# Altium PCB HUB.PcbDoc
Units mil, origin at the board's own origin, x right, y up, seen from the top; angles counter-clockwise.
Board outline 4390 x 2410 mil, 2 copper layers (Top Layer, Bottom Layer); 33 components, 16 nets, 167 pads, 15 vias.
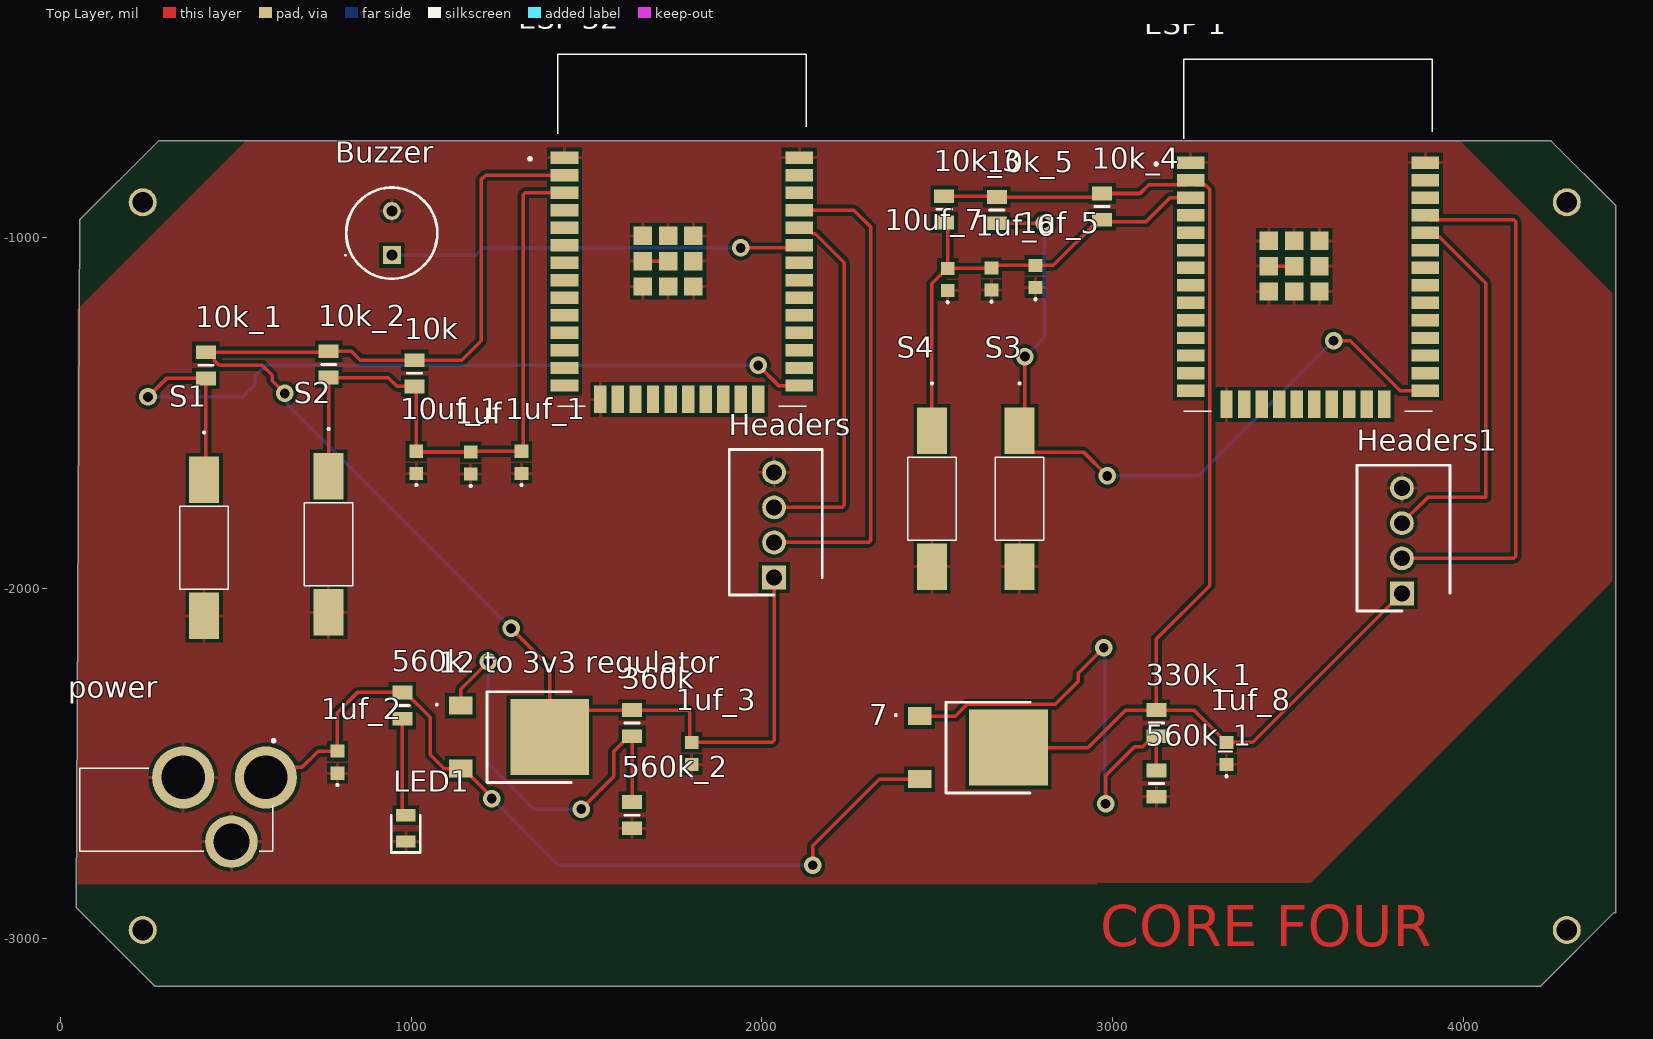
[diagram p0: Top Layer view]
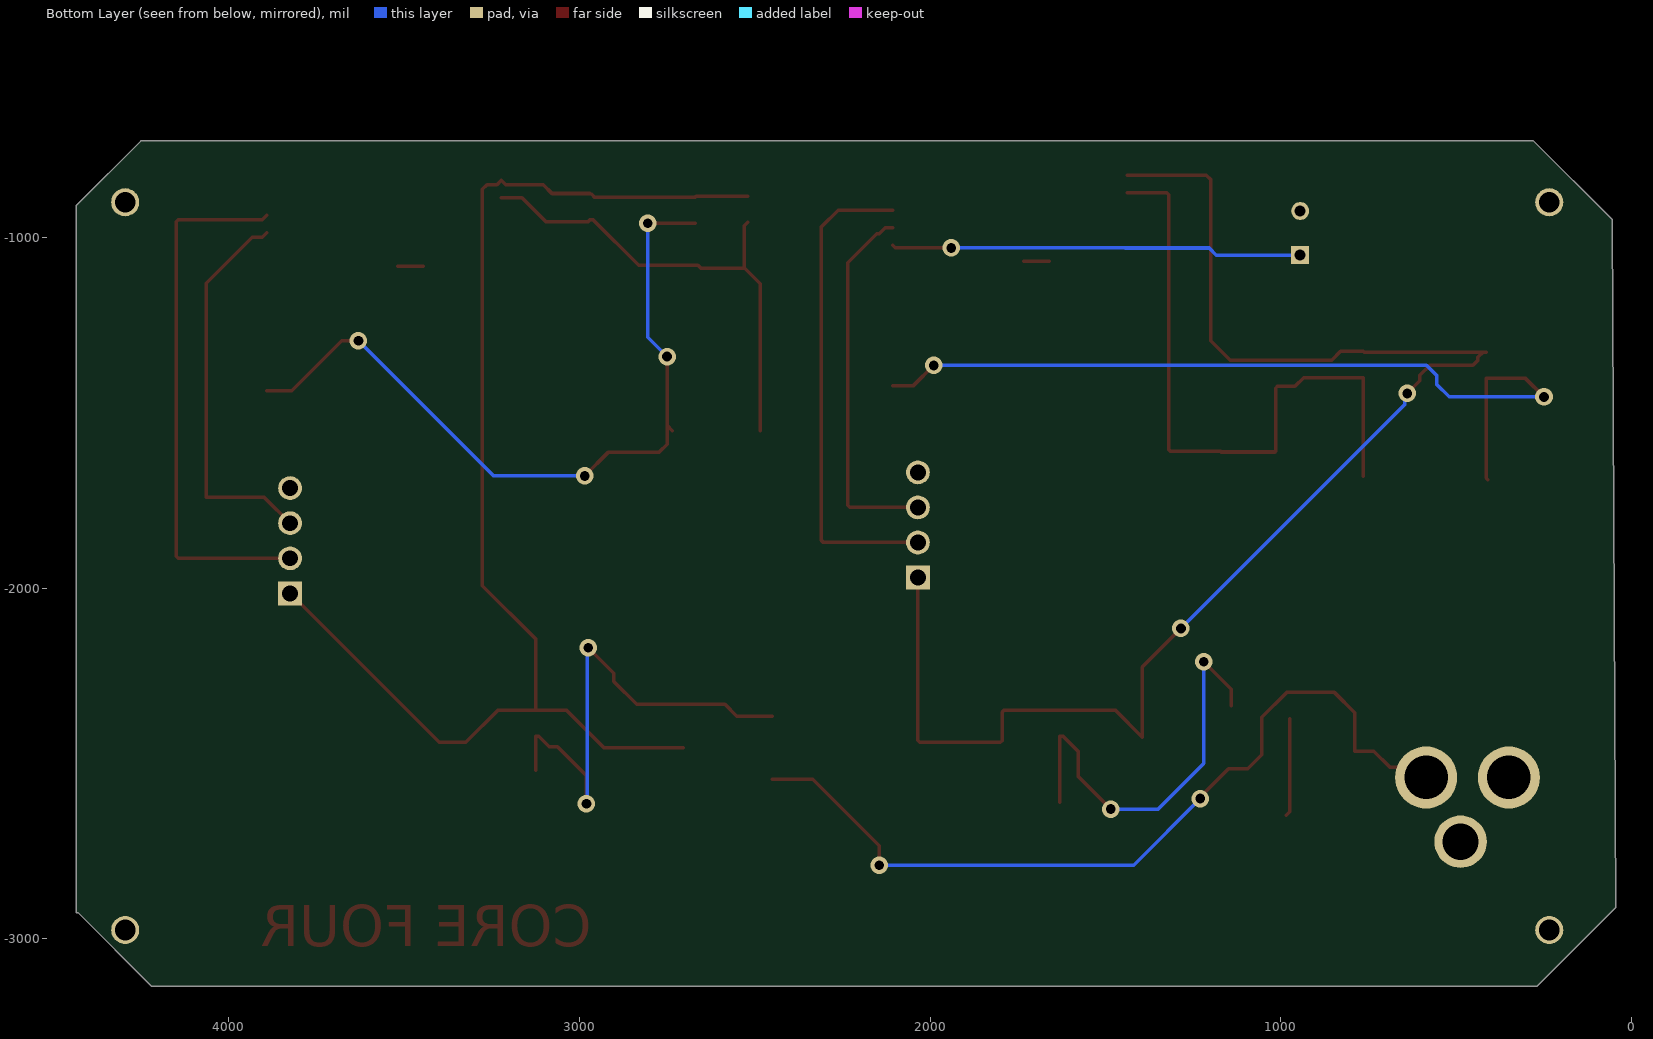
[diagram p1: Bottom Layer view, seen from below]
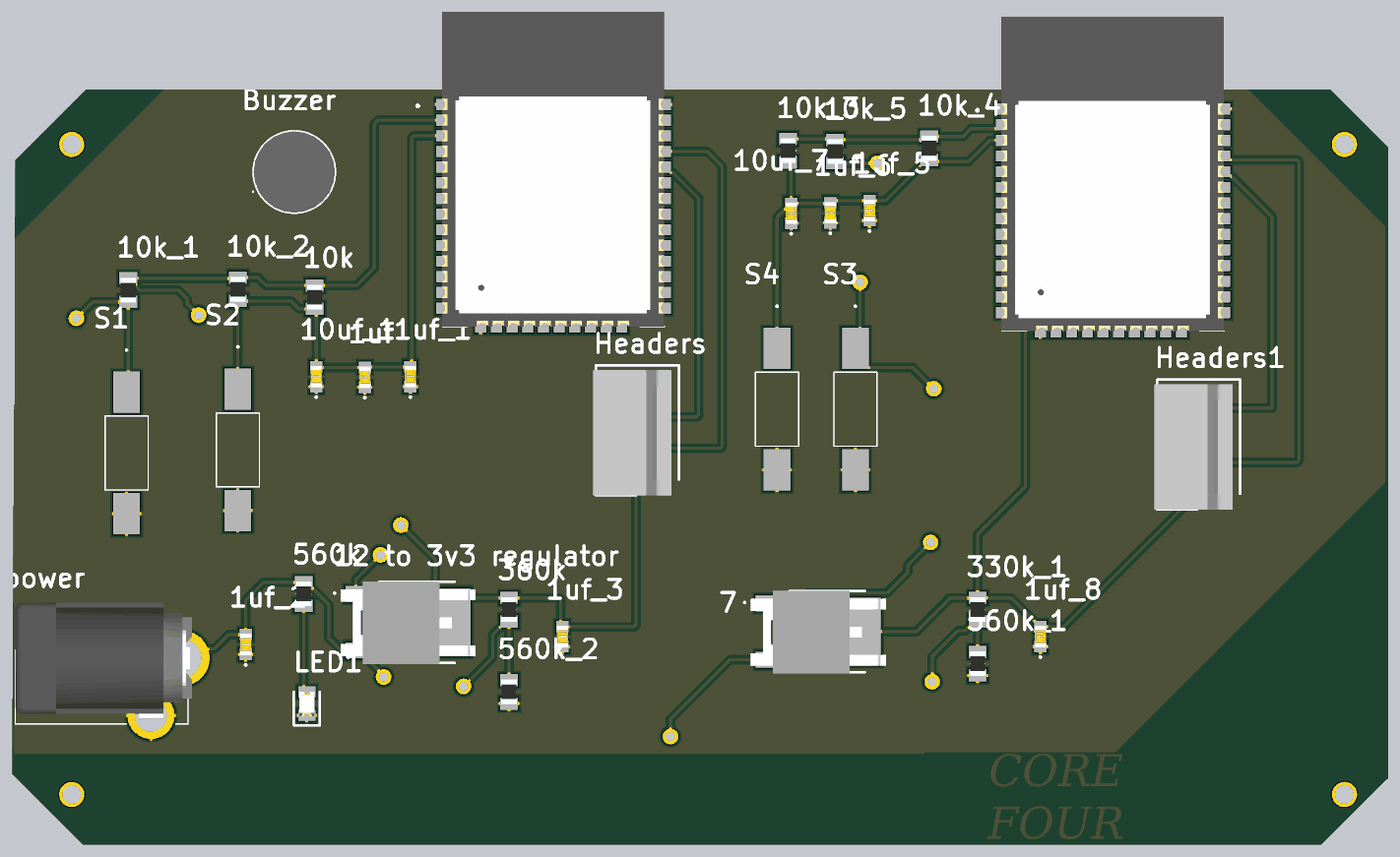
[diagram p2: 3D render of the assembled board from above, using the file's embedded part models]

## Layer stack, top to bottom
Top Solder: solder mask 0.4, Solder Resist, Dk 3.5
Top Layer: signal copper 1.4
Dielectric 1: dielectric 12.6, FR-4, Dk 4.8
Bottom Layer: signal copper 1.4
Bottom Solder: solder mask 0.4, Solder Resist, Dk 3.5

## Board outline
55,-950 280,-725 4250,-725 4435,-910 4435,-2925 4430,-2925 4220,-3135 270,-3135 45,-2910

## Design rules (kind name [scope] priority, off if disabled: settings)
Clearance [All] p1: gap=10 ignorepadtopadclearanceinfootprint=FALSE except(0: Arc-Hole Track-Hole SMDPad-Hole THPad-Hole Via-Hole Fill-Hole Poly-Hole Region-Hole Text-Hole)
PolygonConnect [All] p1: connectstyle=Relief reliefconductorwidth=10 reliefentries=4 polygonreliefangle="90 Angle" airgapwidth=10
RoutingVias [All] p1: holewidth=28 width=50 viastyle="Through Hole" minholewidth=28 minwidth=50 maxholewidth=28 maxwidth=50
SolderMaskExpansion [All] p1: expansion=4 istentingtop=FALSE
Width [All] p1: maxlimit=10 minlimit=10 preferedwidth=10
30 further rules are at their usual default settings.

## Components (designator, comment, footprint, x,y, rotation, side; value= is the part's Value field where it differs from the comment)
1uf "C0603C104K4RALTU" C0603 1170,-1643.5 r90 top
1uf_1 "C0603C104K4RALTU" C0603 1315,-1641.5 r90 top
1uf_2 "C0603C104K4RALTU" C0603 790,-2496.5 r90 top
1uf_3 "C0603C104K4RALTU" C0603 1800,-2471.5 r90 top
1uf_5 "C0603C104K4RALTU" C0603 2780,-1111.5 r90 top
1uf_6 "C0603C104K4RALTU" C0603 2655,-1118.5 r90 top
1uf_8 "C0603C104K4RALTU" C0603 3325,-2471.5 r90 top
7 "LM317AMDTX_NOPB" LM78M05CDT 2764.96,-2454.96 r270 top
10k "CPF0805B100RE1" RESC2012X65N 1010,-1387.6 r90 top
10k_1 "CPF0805B100RE1" RESC2012X65N 415,-1365 r90 top
10k_2 "CPF0805B100RE1" RESC2012X65N 765,-1362.4 r90 top
10k_3 "CPF0805B100RE1" RESC2012X65N 2520,-920 r90 top
10k_4 "CPF0805B100RE1" RESC2012X65N 2970,-912.4 r90 top
10k_5 "CPF0805B100RE1" RESC2012X65N 2670,-922.4 r90 top
10uf_1 "C0603C104K4RALTU" C0603 1015,-1641.5 r90 top
10uf_7 "C0603C104K4RALTU" C0603 2530,-1120 r90 top
"12 to 3v3 regulator" "LM317AMDTX_NOPB" LM78M05CDT 1456.42,-2425 r270 top
330k_1 "CPF0805B100RE1" RESC2012X65N 3125,-2385 r90 top
360k "CPF0805B100RE1" RESC2012X65N 1630,-2385 r90 top
560k "CPF0805B100RE1" RESC2012X65N 975,-2335 r90 top
560k_1 "CPF0805B100RE1" RESC2012X65N 3125,-2557.4 r90 top
560k_2 "CPF0805B100RE1" RESC2012X65N 1630,-2647.4 r90 top
Buzzer "CMT-6635C-030" CMT6635C030 945,-1050.98 r180 top
"ESP 1" "ESP32-WROOM-32D_M113DH3200PS3Q0_" ESP32WROOM32DM113DH3200PS3Q0 3222.48,-786.97 r0 top
"ESP 32" "ESP32-WROOM-32D_M113DH3200PS3Q0_" ESP32WROOM32DM113DH3200PS3Q0 1437.48,-772.48 r0 top
Headers "3-647050-4" SHDR4W66P0X254_1X4_1016X635X1079P 2035,-1970 r90 top
Headers1 "3-647050-4" SHDR4W66P0X254_1X4_1016X635X1079P 3825,-2015 r90 top
LED1 "150080BS75000" LEDC2012X80N 985,-2685 r90 top
power "DC-005-20A" DC00520A 586.22,-2540 r0 top
S1 "TL3302AF180QG" TL3302AF180QG 410,-1885 r270 top
S2 "TL3302AF180QG" TL3302AF180QG 765,-1875 r270 top
S3 "TL3302AF180QG" TL3302AF180QG 2735,-1745 r270 top
S4 "TL3302AF180QG" TL3302AF180QG 2485,-1745 r270 top

## Footprints (in the part's own frame and the unit in brackets; to place one, negate y for a bottom-side part, rotate by r counter-clockwise, add the part's x,y. Pads: shape width x height; smd on the part's side, far side on the other; paste and mask are expansions set on the pad)
C0603 [mm]
  rect 0.95x1 smd: 1(-0.8,0) 2(0.8,0)
  silkscreen extent -1.7,-0.05 -1.6,0.05, body extent -0.87,-0.48 0.88,0.47, height 0.87
CMT6635C030 [mm]
  rect 1.3x1.3 hole 0.8: 1(0,0)
  round 1.3 hole 0.8: 2(0,-3.2)
  silkscreen extent -3.3,-4.9 3.4,1.7, body extent -3.3,-4.89 3.3,1.69, height 4.1
DC00520A [mm]
  round 4.5 hole 3.15: 1(0,0) 2(-6,0)
  round 3.8 hole 2.625: 3(-2.5,-4.65)
  silkscreen extent -13.5,-5.33 0.6,2.72, body extent -13.49,-4.89 0.81,4.51, height 11.15
ESP32WROOM32DM113DH3200PS3Q0 [mm]
  rect 2x0.9 smd: 1(0,0) 2(0,-1.27) 3(0,-2.54) 4(0,-3.81) 5(0,-5.08) 6(0,-6.35) 7(0,-7.62) 8(0,-8.89) 9(0,-10.16) 10(0,-11.43) 11(0,-12.7) 12(0,-13.97) 13(0,-15.24) 14(0,-16.51) 25(17,-16.51) 26(17,-15.24) 27(17,-13.97) 28(17,-12.7) 29(17,-11.43) 30(17,-10.16) 31(17,-8.89) 32(17,-7.62) 33(17,-6.35) 34(17,-5.08) 35(17,-3.81) 36(17,-2.54) 37(17,-1.27) 38(17,0)
  rect 0.9x2 smd: 15(2.6,-17.51) 16(3.87,-17.51) 17(5.14,-17.51) 18(6.41,-17.51) 19(7.68,-17.51) 20(8.95,-17.51) 21(10.22,-17.51) 22(11.49,-17.51) 23(12.76,-17.51) 24(14.03,-17.51)
  rect 1.33x1.33 smd: 39(5.665,-5.665) 40(7.5,-5.665) 41(9.335,-5.665) 42(5.665,-7.5) 43(7.5,-7.5) 44(9.335,-7.5) 45(5.665,-9.335) 46(7.5,-9.335) 47(9.335,-9.335)
  silkscreen extent -2.6,-18.01 17.5,7.49, body extent -0.55,-18 17.45,7.5, height 3.1
LEDC2012X80N [mm]
  rect 0.9x1.4 smd: 1(-0.95,0) 2(0.95,0)
  silkscreen extent -1.75,-1.05 0.95,1.05, body extent -1.03,-0.63 0.97,0.63, height 0.7
LM78M05CDT [mm]
  rect 1.3x1.7 smd: 1(-2.285,-8) 2(2.285,-8)
  rect 5.5x5.7 smd: 3(0,-1.56)
  silkscreen extent -3.29,-9.77 3.29,0, body extent -3.31,-9.25 3.41,1.71, height 2.46
RESC2012X65N [mm]
  rect 1x1.45 smd: 1(-0.95,0) 2(0.95,0)
  silkscreen extent 0,-0.53 0,0.53, body extent -1,-0.63 1,0.63, height 0.65
SHDR4W66P0X254_1X4_1016X635X1079P [mm]
  rect 1.725x1.725 hole 1.15: 1(0,0)
  round 1.725 hole 1.15: 2(2.54,0) 3(5.08,0) 4(7.62,0)
  silkscreen extent -1.27,-3.48 9.27,3.25, body extent -1.28,-2.88 8.88,3.47, height 10.52
TL3302AF180QG [mm]
  rect 3.35x2.16 smd: 1(-4.925,0) 2(4.925,0)
  silkscreen extent -8.4,-1.75 3,1.75

## Part data
1uf 1uf_1 1uf_2 1uf_3 1uf_5 1uf_6 1uf_8 10uf_1 10uf_7: "Capacitor", Manufacturer_Name=KEMET, Mouser Part Number=80-C0603C104K4RAL, Arrow Part Number=C0603C104K4RALTU, Arrow Price/Stock=https://www.arrow.com/en/products/c0603c104k4raltu/kemet-corporation, Datasheet Link=https://content.kemet.com/datasheets/KEM_C1018_X7R_SnPb_SMD.pdf, Height=0.87mm, Manufacturer_Part_Number=C0603C104K4RALTU, Mouser Price/Stock=https://www.mouser.co.uk/ProductDetail/KEMET/C0603C104K4RALTU?qs=Av9gTi0A7zOg0Qy3fuNTKg%3D%3D
7 "12 to 3v3 regulator": "Integrated Circuit", Arrow Part Number=LM317AMDTX/NOPB, Manufacturer_Name="Texas Instruments", Mouser Part Number=926-LM317AMDTX/NOPB, Arrow Price/Stock=https://www.arrow.com/en/products/lm317amdtxnopb/texas-instruments, Datasheet Link=http://www.ti.com/lit/gpn/lm317a, Manufacturer_Part_Number=LM317AMDTX/NOPB, Mouser Price/Stock=https://www.mouser.co.uk/ProductDetail/Texas-Instruments/LM317AMDTX-NOPB?qs=X1J7HmVL2ZE2tJdeke3r6w%3D%3D
10k 10k_1 10k_2 10k_3 10k_4 10k_5 330k_1 360k 560k 560k_1 560k_2: "Resistor", Manufacturer_Name="TE Connectivity", Mouser Part Number=279-CPF0805B100RE1, Arrow Part Number=CPF0805B100RE1, Arrow Price/Stock=https://www.arrow.com/en/products/cpf0805b100re1/te-connectivity?region=nac, Datasheet Link=http://docs-europe.electrocomponents.com/webdocs/13d1/0900766b813d116f.pdf, Height=0.65mm, Manufacturer_Part_Number=CPF0805B100RE1, Mouser Price/Stock=https://www.mouser.co.uk/ProductDetail/TE-Connectivity-Holsworthy/CPF0805B100RE1?qs=9ylKvqdyudkCWLPT1QvLZQ%3D%3D
Buzzer: "Undefined or Miscellaneous", Manufacturer_Name="CUI Devices", Mouser Part Number=490-CMT-6635C-030, Datasheet Link=https://www.cuidevices.com/product/resource/cmt-6635c-030.pdf, Height=4mm, Manufacturer_Part_Number=CMT-6635C-030, Mouser Price/Stock=https://www.mouser.co.uk/ProductDetail/CUI-Devices/CMT-6635C-030?qs=qCxwlXJ4fnxPFuZxoalErQ%3D%3D
"ESP 1" "ESP 32": "Integrated Circuit", Manufacturer_Name="Espressif Systems", Manufacturer_Part_Number=ESP32-WROOM-32D(M113DH3200PS3Q0), Mouser Part Number=356-ESPWROOM3200PS3, Datasheet Link=https://componentsearchengine.com/Datasheets/1/ESP32-WROOM-32D(M113DH3200PS3Q0).pdf, Height=3.2mm, Mouser Price/Stock=https://www.mouser.co.uk/ProductDetail/Espressif-Systems/ESP32-WROOM-32DM113DH3200PS3Q0?qs=wnTfsH77Xs7iNQbBNob0RQ%3D%3D
Headers Headers1: "Connector", Manufacturer_Name="TE Connectivity", Mouser Part Number=571-3-647050-4, Arrow Part Number=3-647050-4, Arrow Price/Stock=https://www.arrow.com/en/products/3-647050-4/te-connectivity?region=nac, Datasheet Link=https://www.te.com/commerce/DocumentDelivery/DDEController?Action=showdoc&DocId=Customer+Drawing%7F647050%7FU%7Fpdf%7FEnglish%7FENG_CD_647050_U.pdf%7F3-647050-4, Height=10.79mm, Manufacturer_Part_Number=3-647050-4, Mouser Price/Stock=https://www.mouser.co.uk/ProductDetail/TE-Connectivity-AMP/3-647050-4?qs=W5ux9j661SoBsMK9vpa9%252BQ%3D%3D
LED1: "LED", Manufacturer_Name="Wurth Elektronik", Mouser Part Number=710-150080BS75000, Datasheet Link=https://katalog.we-online.com/led/datasheet/150080BS75000.pdf, Height=0.8mm, Manufacturer_Part_Number=150080BS75000, Mouser Price/Stock=https://www.mouser.co.uk/ProductDetail/Wurth-Elektronik/150080BS75000?qs=2kOmHSv6VfT2tBo3UPVqAQ%3D%3D
power: "Connector", Manufacturer_Name="Korean Hroparts Elec", Datasheet Link=https://datasheet.lcsc.com/szlcsc/Korean-Hroparts-Elec-DC-005-20A_C130239.pdf, Height=11mm, Manufacturer_Part_Number=DC-005-20A
S1 S2 S3 S4: "Switch", Manufacturer_Name=E-Switch, Mouser Part Number=612-TL3302A, Datasheet Link=https://componentsearchengine.com/Datasheets/2/TL3302AF180QG.pdf, Height=5mm, Manufacturer_Part_Number=TL3302AF180QG, Mouser Price/Stock=https://www.mouser.co.uk/ProductDetail/E-Switch/TL3302AF180QG?qs=HKd%2Fp3M7KlXmC8e3lU%2FDFQ%3D%3D

## Free pads (board coordinates)
  round 80 hole 59.06: 3(235,-900) 4(235,-2975) 5(4295,-2975) 6(4295,-900)

## Via types
v1: diameter 50, hole 28, Top Layer to Bottom Layer, 15 vias

## Nets (pads, with @x,y where several pads share a name; then routed paths per layer and width w, separated by ;. In a path a pad name is that pad's centre, name@x,y a point inside that pad or via, vN(x,y) a via of type N, cw(c..) or ccw(c..) an arc to the next point about the centre after c; other vN are vias at no path point)
3V3: 1uf_3.2 10k.2 10k_1.2 10k_2.2 360k.2 "12 to 3v3 regulator.3" "ESP 32.2" Headers.1 | length 4327
  Top Layer w10: v1(640,-1445) 603.67,-1408.67 603.67,-1393.67 575,-1365 452.4,-1365 438.54,-1351.14 438.54,-1342.28 10k_1.2@423.86,-1327.6 ; v1(1285,-2115) 1395,-2225 1395,-2425 1472.4,-2347.6 360k.2 1789.14,-2347.6 1795,-2353.46 1795,-2435 1uf_3.2 2029.14,-2440 2035,-2434.14 Headers.1 ; 1437.48,-822.48 1212.52,-822.48 1200,-835 1200,-1295 1144.8,-1350.2 10k.2 855.2,-1350.2 830,-1325 10k_2.2 762.4,-1327.6 10k_1.2@423.86,-1327.6 ; 10k_1.2@423.86,-1327.6 10k_1.2 10k_1.2@423.86,-1327.6
  Bottom Layer w10: v1(640,-1445) 647.65,-1452.65 647.65,-1477.65 v1(1285,-2115)
3V3_2: 1uf_8.2 7.3 10k_3.2 10k_4.2 10k_5.2 330k_1.2 "ESP 1.2" Headers1.1 | length 3710.2
  Top Layer w10: 10k_3.2 2667.6,-882.6 10k_5.2 2957.4,-885 10k_4.2@2965,-877.4 ; 7.3 2930.04,-2454.96 3037.4,-2347.6 330k_1.2 ; 10k_4.2 3078.17,-875 3103.48,-849.69 3209.76,-849.69 3222.48,-836.97 3235.2,-849.69 3263.5,-849.69 3276.85,-863.04 3276.85,-1993.15 3125,-2145 330k_1.2 ; Headers1.1 3400,-2440 1uf_8.2 3324.02,-2440 3231.61,-2347.6 330k_1.2
12v: 1uf_2.2 7.2 560k.2 "12 to 3v3 regulator.2" power.1 | length 2431.1
  Top Layer w10: power.1 616.02,-2510.2 689.8,-2510.2 735,-2465 1uf_2.2 790,-2355 847.4,-2297.6 560k.2 983.86,-2297.6 1055,-2368.74 1055,-2475 1094.96,-2514.96 1141.46,-2514.96 1149.33,-2514.96 1230,-2595.63 v1(1230,-2600) ; v1(2145,-2790) 2145,-2735 2335.08,-2544.92 7.2
  Bottom Layer w10: v1(1230,-2600) 1420,-2790 v1(2145,-2790)
EN: 1uf.2 1uf_1.2 10k.1 10k_2.1 10uf_1.2 "ESP 32.3" S2.1 | length 1879.1
  Top Layer w10: S2.1 10k_2.1 934.8,-1399.8 960,-1425 10k.1 1015,-1430 10uf_1.2 1017.01,-1612.01 1uf.2 1172.01,-1610 1uf_1.2 1320,-1605 1320,-878.34 1325.86,-872.48 1437.48,-872.48
EN_2: 1uf_5.2 1uf_6.2 10k_3.1 10k_4.1 10uf_7.2 "ESP 1.3" S4.1 | length 1397.3
  Top Layer w10: S4.1 2485,-1132.52 2529.02,-1088.5 10uf_7.2 ; 10k_3.1 2530,-967.4 10uf_7.2 ; 3222.48,-886.97 3163.92,-886.97 3095.89,-955 2975.2,-955 10k_4.1 2961.14,-949.8 2830.95,-1080 1uf_5.2 2662.01,-1080 1uf_6.2 2653.5,-1088.5 10uf_7.2
GND: 1uf.1 1uf_1.1 1uf_2.1 1uf_3.1 1uf_5.1 1uf_6.1 1uf_8.1 10uf_1.1 10uf_7.1 560k_1.1 560k_2.1 "ESP 1.1" "ESP 1.15" "ESP 1.38" "ESP 1.39" "ESP 1.40" "ESP 1.41" "ESP 1.42" "ESP 1.43" "ESP 1.44" "ESP 1.45" "ESP 1.46" "ESP 1.47" "ESP 32.1" "ESP 32.15" "ESP 32.38" "ESP 32.39" "ESP 32.40" "ESP 32.41" "ESP 32.42" "ESP 32.43" "ESP 32.44" "ESP 32.45" "ESP 32.46" "ESP 32.47" Buzzer.2 Headers1.4 Headers.4 LED1.1 power.2 power.3 S1.2 S2.2 S3.2 S4.2 | length 144.5
  Top Layer w10: 1660.51,-1067.76 1732.76,-1067.76 ; 3445.51,-1082.24 3517.76,-1082.24
GPIO0: 10k_1.1 "ESP 32.25" S1.1 | length 2410.1
  Top Layer w10: v1(250,-1455) 302.6,-1402.4 10k_1.1 415,-1686.1 S1.1 ; v1(1990,-1365) 2047.48,-1422.48 2106.77,-1422.48
  Bottom Layer w10: v1(250,-1455) 520,-1455 556.33,-1418.67 556.33,-1393.67 585,-1365 v1(1990,-1365)
GPIO0_2: 10k_5.1 "ESP 1.25" S3.1 | length 2206.1
  Top Layer w10: 10k_5.1 2670.2,-960 v1(2805,-960) ; S3.1 S3.1@2750,-1536.1 ; v1(2750,-1340) S3.1@2750,-1536.1 ; v1(2985,-1680) 2917.05,-1612.05 2772.52,-1612.05 2750,-1589.53 S3.1@2750,-1536.1 ; v1(3630,-1295) 3678.13,-1295 3820.1,-1436.97 3891.77,-1436.97
  Bottom Layer w10: v1(2750,-1340) 2805,-1285 v1(2805,-960) ; v1(2985,-1680) 3245,-1680 v1(3630,-1295)
Net7_1: 7.1 330k_1.1 560k_1.2 | length 1435.6
  Top Layer w10: 7.1 2551.82,-2365 2585.13,-2331.69 2836.4,-2331.69 2901.87,-2266.22 2901.87,-2243.13 v1(2975,-2170) ; v1(2980,-2615) 2980,-2535 3062.65,-2452.35 3086.2,-2452.35 3116.14,-2422.4 330k_1.1 560k_1.2
  Bottom Layer w10: v1(2975,-2170) 2977.5,-2172.5 2977.5,-2612.5 v1(2980,-2615)
"Net12 to 3v3 regulator_1": 360k.1 560k_2.2 "12 to 3v3 regulator.1" | length 1226.9
  Top Layer w10: 1141.46,-2335.04 1141.46,-2288.54 v1(1220,-2210) ; v1(1485,-2630) 1577.65,-2537.35 1577.65,-2465.89 1621.14,-2422.4 360k.1 560k_2.2
  Bottom Layer w10: v1(1220,-2210) 1220,-2500 1350,-2630 v1(1485,-2630)
Net560k_1: 560k.1 LED1.2 | length 279.3
  Top Layer w10: 560k.1 975,-2637.6 LED1.2
NetBuzzer_1: "ESP 32.33" Buzzer.1 | length 1173.6
  Top Layer w10: v1(1940,-1030) 2099.25,-1030 2106.77,-1022.48
  Bottom Layer w10: Buzzer.1 1183.88,-1050.98 1204.48,-1030.39 1443.36,-1030.39 1443.75,-1030 v1(1940,-1030)
RX: "ESP 32.34" Headers.3 | length 1063.8
  Top Layer w10: Headers.3 2229.14,-1770 2235,-1764.14 2235,-1072.41 2152.35,-989.76 2145.71,-989.76 2128.43,-972.48 2106.77,-972.48
RX_2: "ESP 1.34" Headers1.3 | length 1112
  Top Layer w10: Headers1.3 3898.3,-1741.7 4064.02,-1741.7 4064.02,-1130.92 4061.09,-1127.99 3932.79,-999.69 3904.49,-999.69 3891.77,-986.97
TX: "ESP 32.35" Headers.2 | length 1394.5
  Top Layer w10: Headers.2 2304.14,-1870 2310,-1864.14 2310,-970 2262.48,-922.48 2106.77,-922.48
TX_2: "ESP 1.35" Headers1.2 | length 1546.9
  Top Layer w10: Headers1.2 4144.14,-1915 4150,-1909.14 4150,-955.54 4144.14,-949.69 3904.49,-949.69 3891.77,-936.97
pads on no net: "ESP 1.4" "ESP 1.5" "ESP 1.6" "ESP 1.7" "ESP 1.8" "ESP 1.9" "ESP 1.10" "ESP 1.11" "ESP 1.12" "ESP 1.13" "ESP 1.14" "ESP 1.16" "ESP 1.17" "ESP 1.18" "ESP 1.19" "ESP 1.20" "ESP 1.21" "ESP 1.22" "ESP 1.23" "ESP 1.24" "ESP 1.26" "ESP 1.27" "ESP 1.28" "ESP 1.29" "ESP 1.30" "ESP 1.31" "ESP 1.32" "ESP 1.33" "ESP 1.36" "ESP 1.37" "ESP 32.4" "ESP 32.5" "ESP 32.6" "ESP 32.7" "ESP 32.8" "ESP 32.9" "ESP 32.10" "ESP 32.11" "ESP 32.12" "ESP 32.13" "ESP 32.14" "ESP 32.16" "ESP 32.17" "ESP 32.18" "ESP 32.19" "ESP 32.20" "ESP 32.21" "ESP 32.22" "ESP 32.23" "ESP 32.24" "ESP 32.26" "ESP 32.27" "ESP 32.28" "ESP 32.29" "ESP 32.30" "ESP 32.31" "ESP 32.32" "ESP 32.36" "ESP 32.37"

## Polygon pours and split planes (outlines as drawn)
GND on Top Layer "GND_L01_P000" (solid, remove dead copper, pour order 0): 50,-1205 530,-725 3990,-725 4425,-1160 4425,-1980 3560,-2845 50,-2845

## Other copper
Top Layer:
  text "CORE FOUR" at 2965,-3060.24 h200

## Silkscreen, mask and mechanical layers (free items; w line width, h text height)
Mechanical 1:
  text "GND" at 1805,-1685 h30
  text "GND" at 3565,-1730 h40
  text "RX" at 1835,-1780 h30
  text "RX" at 3600,-1835 h40
  text "TX" at 1835,-1885 h30
  text "TX" at 3600,-1930 h40
  text "3V3" at 1795,-1990 h30
  text "3V3" at 3565,-2035 h40
  text "RESET" at 2435,-2100 h40
  text "BOOT" at 2690,-2100 h40
  text "RESET" at 835,-2115 h40
  text "BOOT" at 185,-2130 h40
  text "POWER" at 70,-2255 h40
  text "12V to 3V3" at 1115,-2275 h20